# Altium PCB Radios_Comunitarias.PcbDoc (part 2 of 2)
Units mil, origin at the board's own origin, x right, y up, seen from the top; angles counter-clockwise.
Board outline 5905.51 x 3937.01 mil, 2 copper layers (Top Layer, Bottom Layer); 217 components, 199 nets, 908 pads, 113 vias.
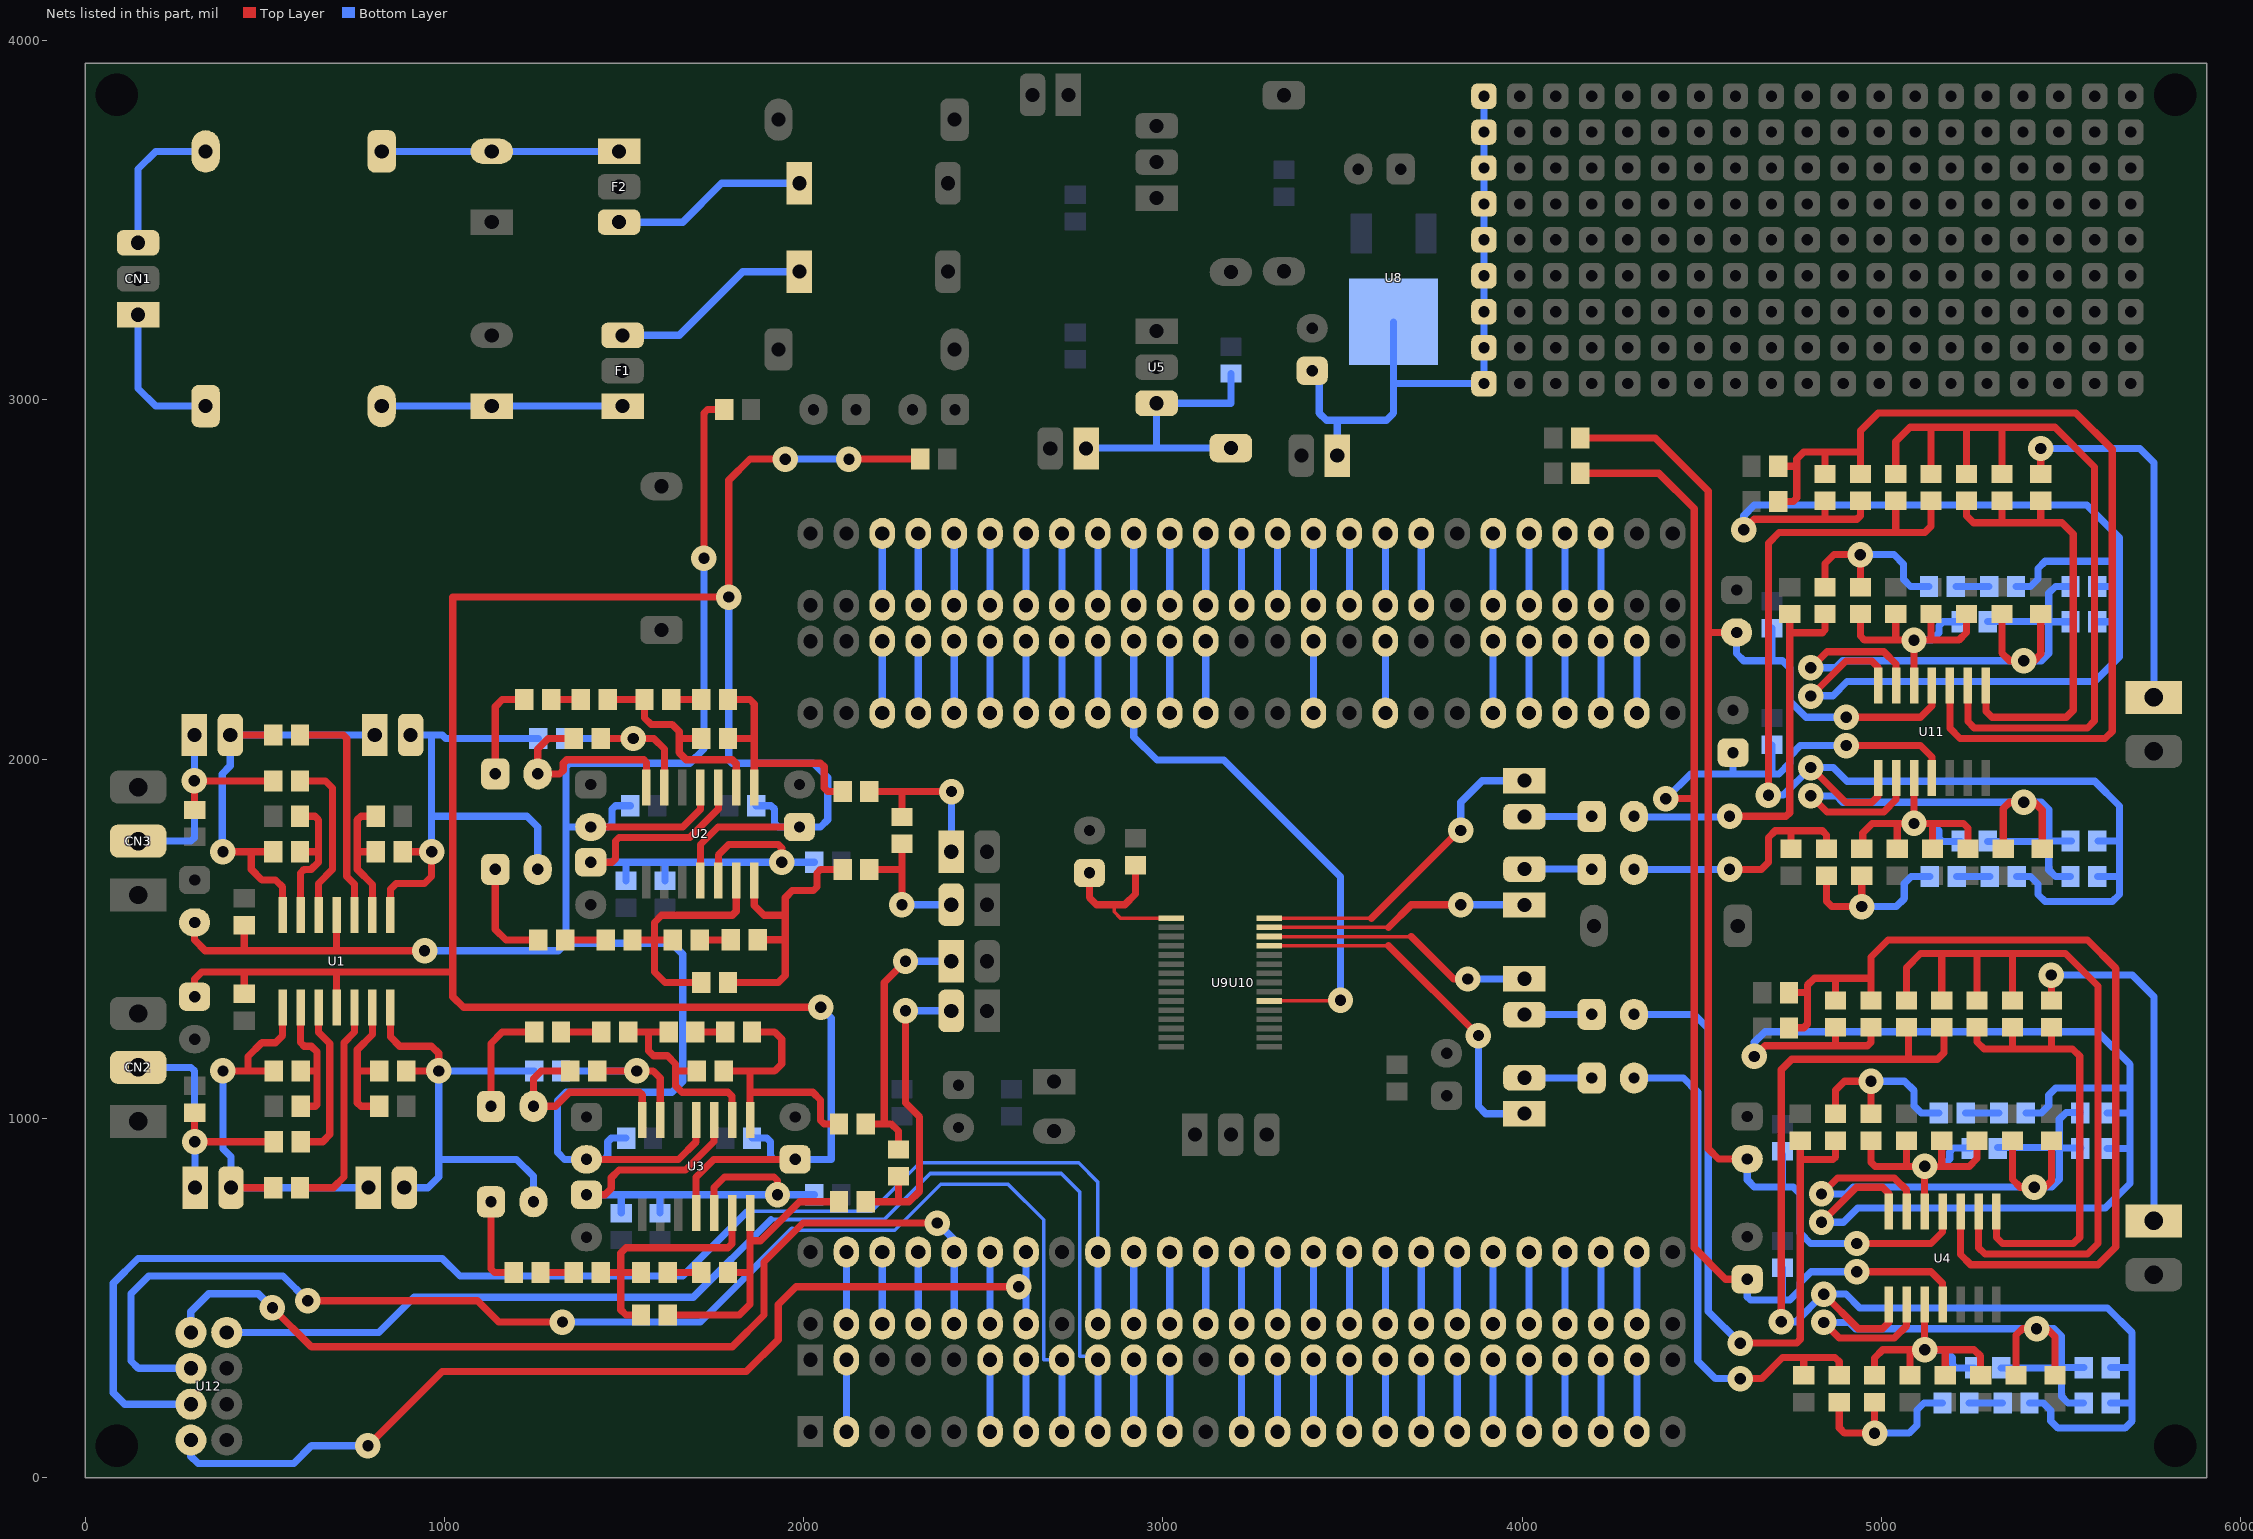
[diagram p2: the nets of this part, all layers, seen from the top]

## Via types
v1: diameter 70.87, hole 31.5, Top Layer to Bottom Layer, 113 vias

## Nets (pads, with @x,y where several pads share a name; then routed paths per layer and width w, separated by ;. In a path a pad name is that pad's centre, name@x,y a point inside that pad or via, vN(x,y) a via of type N, cw(c..) or ccw(c..) an arc to the next point about the centre after c; other vN are vias at no path point) (continued)
I/0UPDATE: U10.P1.10 U12.1 | length 2746.2
  Top Layer w20: v1(521.65,472.44) 629.92,364.17 1801.18,364.17 1889.76,452.76 1889.76,600.39 1998.03,708.66 v1(2372.04,708.66)
  Bottom Layer w20: U12.1@294.49,404.33 294.49,461.81 344.49,511.81 482.28,511.81 v1(521.65,472.44) ; v1(2372.04,708.66) 2418.9,661.81 U10.P1.10@2418.9,627.95 U10.P1.10@2418.9,427.95
NetC3_1: C3.1 D1.1 JP16.1 U5.3 | length 810.1
  Bottom Layer w20: JP16.1@2787.28,2865.24 D1.1@3188.98,2865.24 ; 2982.28,2871.08 U5.3@2982.28,2990.16 3188.98,2990.16 C3.1@3188.98,3072.83
NetC5_1: C5.1 D2.2 F1.1 | length 670.4
  Bottom Layer w20: D2.2@825.71,2982.28 C5.1@1131.89,2982.28 F1.1@1496.06,2982.28
NetC9_1: ?.@3893.31,3044.88 ?.@3893.31,3144.88 ?.@3893.31,3244.88 ?.@3893.31,3344.88 ?.@3893.31,3444.88 ?.@3893.31,3544.88 ?.@3893.31,3644.88 ?.@3893.31,3744.88 ?.@3893.31,3844.88 C9.1 JP15.1 U8.2 | length 1740.7
  Bottom Layer w20: C9.1@3435.04,3080.71 3435.04,2962.6 3454.72,2942.91 3622.05,2942.91 3641.73,2962.6 U8.2@3641.73,3216.54 ; JP15.1@3485.04,2844.49 3485.04,2942.13 ; 3645.28,3044.88 ?.@3893.31,3044.88 ?.@3893.31,3144.88 ?.@3893.31,3244.88 ?.@3893.31,3344.88 ?.@3893.31,3444.88 ?.@3893.31,3544.88 ?.@3893.31,3644.88 ?.@3893.31,3744.88 ?.@3893.31,3844.88
NetC10_2: C10.2 D4.1 F2.1 | length 660.5
  Bottom Layer w20: D4.1@825.71,3690.94 C10.2@1131.89,3690.94 F2.1@1486.22,3690.94
NetC17_1: C17.1 R19.2 R24.1 U3.9 | length 610.8
  Top Layer w20: R24.1@1511.81,1240.16 1567.91,1240.16 ; R19.2@1624.02,1240.16 1567.91,1240.16 ; 1643.7,1131.89 C17.1@1702.76,1131.89 ; U3.9@1800.79,995.14 1800.79,1061.42 1789.37,1072.83 1661.42,1072.83 1643.7,1090.55 1643.7,1151.57 1621.31,1173.97 1581.94,1173.97 1567.91,1187.99 1567.91,1240.16
NetC17_2: C17.2 R20.1 R25.2 U3.8 | length 783.8
  Top Layer w20: C17.2@1777.56,1131.89 1850.79,1131.89 ; U3.8@1850.79,995.14 1850.79,1072.83 ; R20.1@1856.3,1240.16 1919.29,1240.16 1938.98,1220.47 1938.98,1151.57 1919.29,1131.89 1850.79,1131.89 ; R25.2@2098.43,984.25 2057.09,984.25 2047.24,994.09 2047.24,1051.18 2025.59,1072.83 1850.79,1072.83 ; 1850.79,1072.83 1850.79,1131.89
NetC18_1: C18.1 R23.2 | length 308.3
  Top Layer w20: C18.1@1129.92,1033.46 1129.92,1208.66 1161.42,1240.16 R23.2@1250,1240.16
NetC18_2: C18.2 R21.1 U3.14 | length 580.5
  Top Layer w20: R21.1@1350.39,1131.89 1269.69,1131.89 1248.03,1110.24 C18.2@1248.03,1033.46 1309.05,1033.46 1348.43,1072.83 1543.31,1072.83 1550.79,1065.35 U3.14@1550.79,995.14
NetC22_1: C22.1 JP9.2 R31.1 | length 878.1
  Top Layer w20: R31.1@2173.23,767.72 2263.78,767.72 ; C22.1@2263.78,838.58 2263.78,767.72 ; v1(2283.46,1299.21) 2283.46,1043.31 2322.83,1003.94 2322.83,797.24 2293.31,767.72 2263.78,767.72
  Bottom Layer w20: v1(2283.46,1299.21) JP9.2@2410.63,1299.21
NetC22_2: C22.2 JP8.1 R25.1 | length 754.3
  Top Layer w20: R25.1@2173.23,984.25 2224.41,984.25 ; C22.2@2263.78,913.39 2263.78,964.57 2244.09,984.25 2224.41,984.25 ; v1(2283.46,1437.01) 2224.41,1377.95 2224.41,984.25
  Bottom Layer w20: v1(2283.46,1437.01) JP8.1@2410.63,1437.01
NetC24_1: C24.1 R26.2 R29.1 U3.6 | length 740.3
  Top Layer w20: R29.1@1435.04,570.87 1491.14,570.87 ; C24.1@1547.24,452.76 1505.91,452.76 1491.14,467.52 1491.14,570.87 ; R26.2@1547.24,570.87 1491.14,570.87 ; U3.6@1800.78,739.11 1800.78,651.18 1789.37,639.76 1505.91,639.76 1491.14,625 1491.14,570.87
NetC24_2: C24.2 R27.1 R31.2 U3.7 | length 849.3
  Top Layer w20: C24.2@1622.05,452.76 1820.87,452.76 1850.79,482.68 1850.79,659.45 ; R27.1@1789.37,570.87 1850.59,570.87 ; U3.7@1850.79,737.14 1850.79,659.45 ; R31.2@2098.43,767.72 1988.19,767.72 1879.92,659.45 1850.79,659.45
NetC25_1: C25.1 R28.2 | length 254.1
  Top Layer w20: C25.1@1129.92,767.72 1129.92,580.71 1139.76,570.87 R28.2@1192.91,570.87
NetC25_2: C25.2 JP2.2 R9.1 R22.2 U1.7 | length 1407.1
  Top Layer w20: U1.7@850,1308.01 850,1226.77 875.98,1200.79 964.57,1200.79 984.25,1181.1 v1(984.25,1131.89) R9.1@883.86,1131.89
  Bottom Layer w20: JP2.2@888.58,807.09 954.72,807.09 984.25,836.61 984.25,885.83 ; C25.2@1248.03,767.72 1248.03,838.58 1200.79,885.83 984.25,885.83 ; R22.2@1250,1131.89 1049.21,1131.89 v1(984.25,1131.89) 984.25,885.83
NetC26_1: C26.1 C27.1 R30.1 R32.2 U3.5 U3.10 | length 1524
  Top Layer w20: C27.1@1395.67,787.4 1446.85,787.4 1464.57,805.12 1464.57,834.65 1486.22,856.3 1671.26,856.3 1750.79,935.83 U3.10@1750.79,995.14 ; U3.5@1750.79,737.14 1750.79,807.87 1779.53,836.61 1917.32,836.61 1927.17,826.77 v1(1927.17,787.4)
  Bottom Layer w20: C27.1@1395.67,787.4 v1(1927.17,787.4) R30.1@2029.53,787.4 ; C26.1@1492.13,736.22 1492.13,783.46 ; R32.2@1600.39,736.22 1600.39,783.46
NetC28_1: C28.1 R33.2 R38.1 U2.9 | length 612.7
  Top Layer w20: R38.1@1454.72,2165.35 R33.2@1557.09,2165.35 1557.09,2114.17 1574.8,2096.46 1633.86,2096.46 1653.54,2076.77 1653.54,2017.72 1673.23,1998.03 1801.18,1998.03 1812.6,1986.61 U2.9@1812.6,1920.34 ; 1664.68,2057.09 C28.1@1714.57,2057.09
NetC28_2: C28.2 R34.1 R39.2 U2.8 | length 697.2
  Top Layer w20: C28.2@1789.37,2057.09 1862.6,2057.09 ; R34.1@1789.37,2165.35 1850.39,2165.35 1862.6,2153.15 1862.6,2057.09 ; U2.8@1862.6,1920.34 1862.6,2057.09 ; 1862.6,1988.19 2047.24,1988.19 2057.09,1978.35 2057.09,1919.29 2066.93,1909.45 R39.2@2108.27,1909.45
NetC29_1: C29.1 R37.2 | length 275.9
  Top Layer w20: C29.1@1141.73,1958.66 1141.73,2145.67 1161.42,2165.35 R37.2@1222.44,2165.35
NetC29_2: C29.2 R35.1 U2.14 | length 585.4
  Top Layer w20: R35.1@1360.24,2057.09 1289.37,2057.09 1259.84,2027.56 C29.2@1259.84,1958.66 1320.87,1958.66 1330.71,1968.5 1330.71,1988.19 1340.55,1998.03 1397.64,1998.03 1555.12,1998.03 1562.6,1990.55 U2.14@1562.6,1920.34
NetC33_1: C33.1 JP7.2 R45.1 | length 396.9
  Top Layer w20: R45.1@2183.07,1692.91 2273.62,1692.91 ; v1(2273.62,1594.49) 2273.62,1692.91 ; C33.1@2273.62,1763.78 2273.62,1692.91
  Bottom Layer w20: v1(2273.62,1594.49) JP7.2@2410.63,1594.49
NetC33_2: C33.2 JP6.1 R39.1 | length 465.7
  Top Layer w20: R39.1@2183.07,1909.45 2273.62,1909.45 ; C33.2@2273.62,1838.58 2273.62,1909.45 ; v1(2411.42,1909.45) 2273.62,1909.45
  Bottom Layer w20: JP6.1@2411.42,1742.91 v1(2411.42,1909.45)
NetC35_1: C35.1 R40.2 R43.1 U2.6 | length 720.9
  Top Layer w20: R43.1@1523.62,1496.06 1584.65,1496.06 ; R40.2@1635.83,1496.06 1584.65,1496.06 ; C35.1@1714.57,1377.95 1614.17,1377.95 1584.65,1407.48 1584.65,1496.06 ; U2.6@1812.59,1664.31 1812.59,1576.37 1801.18,1564.96 1604.33,1564.96 1584.65,1545.28 1584.65,1496.06
NetC35_2: C35.2 R41.1 R45.2 U2.7 | length 834.5
  Top Layer w20: C35.2@1789.37,1377.95 1929.13,1377.95 1948.82,1397.64 1948.82,1614.17 1968.5,1633.86 2027.56,1633.86 2037.4,1643.7 2037.4,1683.07 2047.24,1692.91 R45.2@2108.27,1692.91 ; U2.7@1862.59,1664.31 1862.59,1592.13 1889.76,1564.96 1938.98,1564.96 ; R41.1@1872.44,1496.98 1947.9,1496.98
NetC36_1: C36.1 R42.2 | length 299.6
  Top Layer w20: C36.1@1141.73,1692.91 1141.73,1525.59 1171.26,1496.06 R42.2@1261.81,1496.06
NetC36_2: C36.2 JP4.2 R16.1 R36.2 U1.8 | length 1470.3
  Top Layer w20: U1.8@850,1566.01 850,1637.4 866.14,1653.54 944.88,1653.54 964.57,1673.23 v1(964.57,1742.13) R16.1@874.02,1742.13
  Bottom Layer w20: JP4.2@906.3,2066.93 964.57,2066.93 ; v1(964.57,1742.13) 964.57,1840.55 ; C36.2@1259.84,1692.91 1259.84,1811.02 1230.32,1840.55 964.57,1840.55 ; R36.2@1261.81,2057.09 1061.02,2057.09 1003.94,2057.09 994.09,2066.93 964.57,2066.93 ; 964.57,1840.55 964.57,2066.93
NetC37_1: C37.1 C38.1 R44.1 R46.2 U2.5 U2.10 | length 1531.6
  Top Layer w20: C38.1@1407.48,1712.6 1466.54,1712.6 1476.38,1722.44 1476.38,1771.65 1486.22,1781.5 1683.07,1781.5 1762.6,1861.02 U2.10@1762.6,1920.34 ; U2.5@1762.6,1662.34 1762.6,1733.07 1791.34,1761.81 1929.13,1761.81 1938.98,1751.97 v1(1938.98,1712.6)
  Bottom Layer w20: C38.1@1407.48,1712.6 1505.91,1712.6 ; C37.1@1505.91,1661.42 1505.91,1712.6 ; R46.2@1614.17,1661.42 1614.17,1712.6 ; R44.1@2029.53,1712.6 v1(1938.98,1712.6) 1614.17,1712.6 ; 1505.91,1712.6 1614.17,1712.6
NetC39_1: C39.1 C40.2 | length 92.5
  Bottom Layer w20: C39.1@5244.09,207.74 C40.2@5336.61,207.74
NetC39_2: C39.2 R47.2 R48.1 | length 509.7
  Top Layer w20: R47.2@4881.89,209.71 4881.89,138.84 4896.85,123.88 v1(4980.31,123.88) R48.1@4980.31,209.71
  Bottom Layer w20: v1(4980.31,123.88) 5076.38,123.88 5098.42,145.93 5098.42,188.06 5118.11,207.74 C39.2@5169.29,207.74
NetC40_1: C40.1 C48.2 R50.2 R51.1 R54.1 U4.1 | length 3368.3
  Top Layer w20: v1(4720.46,434.1) 4720.46,1135.15 4750,1164.69 5074.8,1164.69 ; v1(4838.58,510.76) 4934.91,414.43 5002.36,414.43 5019.68,431.76 U4.1@5019.68,482.28 ; R54.1@5074.8,1253.02 5074.8,1164.69 ; R51.1@5173.23,1253.02 5173.23,1182.15 5155.76,1164.69 5074.8,1164.69
  Bottom Layer w20: v1(4720.46,434.1) 4761.92,434.1 v1(4838.58,510.76) 4901.05,510.76 4939.37,472.44 5628.35,472.44 5697.24,403.54 5697.24,207.74 ; C40.1@5411.42,207.74 5450.13,207.74 5470.87,187.01 5470.87,157.48 5490.55,137.8 5677.56,137.8 5697.24,157.48 5697.24,207.74 ; C48.2@5637.8,207.74 5697.24,207.74 ; R50.2@5637.8,306.17 5696.2,306.17
NetC41_1: C41.1 JP10.2 | length 186.2
  Bottom Layer w20: JP10.2@4006.69,1112.2 C41.1@4192.91,1112.2
NetC41_2: C41.2 R47.1 R49.2 | length 1473.6
  Top Layer w20: v1(4606.3,275.59) 4665.35,275.59 4724.41,334.65 4783.46,334.65 ; R49.2@4783.46,284.51 4783.46,334.65 ; R47.1@4881.89,284.51 4881.89,323.23 4870.47,334.65 4783.46,334.65
  Bottom Layer w20: C41.2@4311.02,1112.2 4448.82,1112.2 4488.19,1072.83 4488.19,324.8 4537.4,275.59 v1(4606.3,275.59)
NetC42_1: C42.1 R51.2 R52.2 R54.2 U4.9 | length 2236.8
  Top Layer w20: R54.2@5068.9,1328.87 5068.9,1419.42 5108.27,1458.79 5167.32,1458.79 ; R51.2@5167.32,1328.87 5167.32,1458.79 ; C42.1@5265.75,1328.87 5265.75,1458.79 ; U4.9@5269.68,740.28 5269.68,639.89 5287.4,622.17 5572.96,622.17 5602.36,651.57 5602.36,1368.24 5511.81,1458.79 5364.17,1458.79 ; R52.2@5364.17,1328.87 5364.17,1458.79 ; 5167.32,1458.79 5265.75,1458.79 ; 5265.75,1458.79 5364.17,1458.79
NetC42_2: C42.2 R52.1 R56.1 U4.8 | length 1286.6
  Top Layer w20: C42.2@5265.75,1254.06 5265.75,1212.72 5285.43,1193.04 5364.17,1193.04 ; U4.8@5319.68,740.28 5319.68,668.63 5336.61,651.7 5533.59,651.7 5551.18,669.29 5551.18,1173.35 5531.5,1193.04 5472.44,1193.04 ; R52.1@5364.17,1254.06 5364.17,1193.04 ; R56.1@5472.44,1254.06 5472.44,1193.04 ; 5364.17,1193.04 5472.44,1193.04
NetC43_1: C43.1 C44.2 C45.2 C46.2 R48.2 U4.3 | length 843.1
  Top Layer w20: R48.2@4980.31,284.51 4980.31,333.33 5003.15,356.17 v1(5119.68,356.17) ; C44.2@5078.74,284.51 5078.74,350.26 ; U4.3@5119.68,482.28 v1(5119.68,356.17) ; C45.2@5177.17,284.51 5177.17,350.26 ; C46.2@5275.59,284.51 5275.59,338.06 5257.48,356.17 v1(5119.68,356.17)
  Bottom Layer w20: v1(5119.68,356.17) 5175.72,356.17 5197.24,334.65 5197.24,314.96 5207.09,305.12 C43.1@5257.87,305.12
NetC43_2: C43.2 C47.1 C48.1 R50.1 R53.1 U4.2 | length 1810.2
  Top Layer w20: v1(4838.58,432.02) 4882.17,388.43 5035.42,388.43 5069.68,422.7 U4.2@5069.68,482.28 ; C47.1@5374.02,284.51 5374.02,396.72 5391.73,414.43 v1(5431.1,414.43) 5459.98,414.43 5482.28,392.13 R53.1@5482.28,284.51
  Bottom Layer w20: v1(4838.58,432.02) 4909.57,432.02 4927.17,414.43 5479.66,414.43 5500.39,393.7 5500.39,305.12 ; C43.2@5332.68,305.12 5500.39,305.12 ; 5501.44,306.17 R50.1@5562.99,306.17 ; C48.1@5561.02,207.74 5519.03,207.74 5500.39,226.38 5500.39,305.12
NetC49_1: C49.1 R55.2 R57.2 R58.2 U4.10 | length 2673.3
  Top Layer w20: C49.1@4742.13,1252.09 4783.46,1252.09 4793.31,1261.94 4793.31,1350.52 ; R58.2@4742.13,1350.52 4793.31,1350.52 ; R57.2@4872.05,1328.87 4872.05,1389.89 ; R55.2@4970.47,1328.87 4970.47,1448.95 5017.59,1496.06 5572.96,1496.06 5651.57,1417.45 5651.57,641.73 5602.49,592.65 5248.03,592.65 5219.68,620.99 U4.10@5219.68,740.28 ; 4970.47,1389.89 4872.05,1389.89 ; 4793.31,1350.52 4793.31,1370.21 4812.99,1389.89 4872.05,1389.89
NetC50_1: C50.1 C51.2 | length 92.5
  Bottom Layer w20: C50.1@5234.25,1014.83 C51.2@5326.77,1014.83
NetC50_2: C50.2 R59.2 R60.1 | length 515.4
  Top Layer w20: R59.2@4872.05,1012.86 4872.05,1078.74 4896.72,1103.41 v1(4970.47,1103.41) R60.1@4970.47,1012.86
  Bottom Layer w20: v1(4970.47,1103.41) 5063.78,1103.41 5090.55,1076.64 5090.55,1034.51 5110.24,1014.83 C50.2@5159.45,1014.83
NetC51_1: C51.1 C62.2 R55.1 R57.1 R62.2 U4.14 | length 3549.1
  Top Layer w20: v1(4645.67,1172.31) 4675.2,1201.83 4872.05,1201.83 ; v1(4832.68,710.76) 4930.05,808.13 5002.36,808.13 5019.68,790.81 U4.14@5019.68,740.28 ; R57.1@4872.05,1253.02 4872.05,1201.83 ; R55.1@4970.47,1253.02 4970.47,1211.68 4960.63,1201.83 4872.05,1201.83
  Bottom Layer w20: v1(4645.67,1172.31) 4645.67,1211.68 4675.2,1241.2 5600.39,1241.2 5691.34,1150.26 5691.34,1014.83 ; v1@4833.72,710.76 4894.09,710.76 4933.46,750.13 5622.44,750.13 5691.34,819.02 5691.34,1014.83 ; C51.1@5401.57,1014.83 5444.23,1014.83 5464.96,1035.56 5464.96,1065.09 5484.65,1084.77 5691.34,1084.77 ; C62.2@5627.95,916.4 5690.29,916.4 ; R62.2@5627.95,1014.83 5691.34,1014.83
NetC53_1: C53.1 JP11.2 | length 186.2
  Bottom Layer w20: JP11.2@4005.91,1288.58 C53.1@4192.13,1288.58
NetC53_2: C53.2 R59.1 R61.2 | length 2006.9
  Top Layer w20: v1(4606.29,374.02) 4607.34,375.06 4763.78,375.06 4773.62,384.91 4773.62,885.83 ; R61.2@4773.62,938.06 4773.62,885.83 ; R59.1@4872.05,938.06 4872.05,893.31 4864.57,885.83 4773.62,885.83
  Bottom Layer w20: C53.2@4311.02,1289.37 4478.35,1289.37 4517.72,1250 4517.72,462.61 v1(4606.29,374.02)
NetC55_1: C55.1 C57.2 C58.2 C59.2 R60.2 U4.12 | length 850.8
  Top Layer w20: R60.2@4970.47,939.1 4970.47,877.82 4981.89,866.4 5068.9,866.4 ; C57.2@5068.9,938.06 5068.9,866.4 ; U4.12@5119.68,740.28 v1(5119.68,866.4) ; C58.2@5167.32,938.06 5167.32,866.4 ; C59.2@5265.75,938.06 5265.75,887.92 5244.23,866.4 5167.32,866.4 ; 5068.9,866.4 v1(5119.68,866.4) ; v1(5119.68,866.4) 5167.32,866.4
  Bottom Layer w20: v1(5119.68,866.4) 5168.9,866.4 5189.37,886.87 5189.37,906.56 5200.26,917.45 C55.1@5248.03,917.45
NetC55_2: C55.2 C60.1 C62.1 R62.1 R63.1 U4.13 | length 1818.5
  Top Layer w20: v1(4832.68,789.5) 4877.31,834.13 5035.42,834.13 5069.68,799.87 U4.13@5069.68,740.28 ; C60.1@5364.17,938.06 5364.17,829.79 5385.83,808.13 v1(5425.2,808.13) 5454.07,808.13 5472.44,826.5 R63.1@5472.44,938.06
  Bottom Layer w20: v1(4832.68,789.5) 4901.57,789.5 4921.26,809.18 5425.2,809.18 5473.76,809.18 5494.49,829.91 5494.49,917.45 ; C55.2@5322.83,918.5 5494.49,918.5 ; R62.1@5553.15,1015.87 5513.13,1015.87 5494.49,997.24 5494.49,918.5 ; C62.1@5555.12,917.45 5494.49,917.45 ; 5494.49,917.45 5494.49,918.5
NetC63_1: C63.1 C64.2 | length 92.5
  Bottom Layer w20: C63.1@5208.66,1673.23 C64.2@5301.18,1673.23
NetC63_2: C63.2 R64.2 R65.1 | length 509.7
  Top Layer w20: R64.2@4846.46,1675.2 4846.46,1604.33 4861.42,1589.37 v1(4944.88,1589.37) R65.1@4944.88,1675.2
  Bottom Layer w20: v1(4944.88,1589.37) 5040.94,1589.37 5062.99,1611.42 5062.99,1653.54 5082.68,1673.23 C63.2@5133.86,1673.23
NetC64_1: C64.1 C72.2 R67.2 R68.1 R71.1 U11.1 | length 3376.6
  Top Layer w20: v1(4685.03,1899.59) 4685.03,2600.64 4714.57,2630.17 5039.37,2630.17 ; v1(4803.15,1976.25) 4900.53,1878.87 4972.83,1878.87 4990.16,1896.2 U11.1@4990.16,1946.72 ; R71.1@5039.37,2718.5 5039.37,2630.17 ; R68.1@5137.8,2718.5 5137.8,2647.64 5120.33,2630.17 5039.37,2630.17
  Bottom Layer w20: v1(4685.03,1899.59) 4726.49,1899.59 v1(4803.15,1976.25) 4865.61,1976.25 4903.94,1937.93 5592.91,1937.93 5661.81,1869.03 5661.81,1673.23 ; C64.1@5375.98,1673.23 5414.7,1673.23 5435.43,1652.5 5435.43,1622.97 5455.12,1603.28 5642.13,1603.28 5661.81,1622.97 5661.81,1673.23 ; C72.2@5600.39,1673.23 5661.81,1673.23 ; R67.2@5602.36,1771.65 5660.76,1771.65
NetC65_1: C65.1 JP12.2 | length 187
  Bottom Layer w20: JP12.2@4005.91,1693.7 C65.1@4192.13,1693.7 ; C65.1@4192.13,1692.91 C65.1@4192.91,1692.91
NetC65_2: C65.2 R64.1 R66.2 | length 713.8
  Top Layer w20: v1(4576.77,1692.91) 4665.35,1692.91 4685.04,1712.6 4685.04,1781.5 4703.68,1800.13 4748.03,1800.13 ; R66.2@4748.03,1750 4748.03,1800.13 ; R64.1@4846.46,1750 4846.46,1788.72 4835.04,1800.13 4748.03,1800.13
  Bottom Layer w20: C65.2@4311.02,1692.91 v1(4576.77,1692.91)
NetC66_1: C66.1 R68.2 R69.2 R71.2 U11.9 | length 2270.4
  Top Layer w20: R71.2@5039.37,2793.31 5039.37,2883.86 5078.74,2923.23 5137.8,2923.23 ; R68.2@5137.8,2793.31 5137.8,2923.23 ; C66.1@5236.22,2793.31 5236.22,2923.23 ; U11.9@5240.16,2204.72 5240.16,2104.33 5257.87,2086.61 5572.83,2086.61 5592.52,2106.3 5592.52,2812.99 5482.28,2923.23 5334.65,2923.23 ; R69.2@5334.65,2793.31 5334.65,2923.23 ; 5137.8,2923.23 5236.22,2923.23 ; 5236.22,2923.23 5334.65,2923.23
NetC66_2: C66.2 R69.1 R73.1 U11.8 | length 1302.1
  Top Layer w20: C66.2@5236.22,2718.5 5236.22,2677.17 5255.91,2657.48 5334.65,2657.48 ; U11.8@5290.16,2204.72 5290.16,2133.07 5307.09,2116.14 5513.78,2116.14 5533.46,2135.83 5533.46,2625.98 5501.97,2657.48 5442.91,2657.48 ; R69.1@5334.65,2718.5 5334.65,2657.48 ; R73.1@5442.91,2718.5 5442.91,2657.48 ; 5334.65,2657.48 5442.91,2657.48
NetC67_1: C67.1 C68.2 C69.2 C70.2 R65.2 U11.3 | length 842.5
  Top Layer w20: R65.2@4947.24,1748.95 4947.24,1794.23 4973.62,1820.61 5043.31,1820.61 ; C69.2@5043.31,1750 5043.31,1820.61 ; U11.3@5090.16,1946.72 v1(5090.16,1820.61) ; C70.2@5141.73,1750 5141.73,1820.61 ; C68.2@5240.16,1750 5240.16,1808.4 5227.95,1820.61 5141.73,1820.61 ; 5043.31,1820.61 v1(5090.16,1820.61) ; v1(5090.16,1820.61) 5141.73,1820.61
  Bottom Layer w20: v1(5090.16,1820.61) 5139.37,1820.61 5159.84,1800.13 5159.84,1780.45 5169.69,1770.61 C67.1@5220.47,1770.61
NetC67_2: C67.2 C71.1 C72.1 R67.1 R70.1 U11.2 | length 1818.5
  Top Layer w20: v1(4803.15,1897.51) 4847.79,1852.87 5005.89,1852.87 5040.16,1887.14 U11.2@5040.16,1946.72 ; C71.1@5338.58,1750 5338.58,1862.2 5356.3,1879.92 v1(5395.67,1879.92) 5424.54,1879.92 5446.85,1857.61 R70.1@5446.85,1750
  Bottom Layer w20: v1(4803.15,1897.51) 4874.14,1897.51 4891.73,1879.92 v1(5395.67,1879.92) 5444.23,1879.92 5464.96,1859.19 5464.96,1770.61 ; C67.2@5295.28,1770.61 5464.96,1770.61 ; 5466.01,1771.65 R67.1@5527.56,1771.65 ; C72.1@5525.59,1673.23 5483.6,1673.23 5464.96,1691.87 5464.96,1770.61
NetC73_1: C73.1 R72.2 R74.2 R75.2 U11.10 | length 2720.1
  Top Layer w20: C73.1@4712.6,2716.54 4753.94,2716.54 4763.78,2726.38 4763.78,2814.96 ; R75.2@4712.6,2814.96 4763.78,2814.96 ; R72.2@4842.52,2793.31 4842.52,2854.33 ; R74.2@4940.94,2793.31 4940.94,2913.39 4990.16,2962.6 5541.34,2962.6 5641.73,2862.2 5641.73,2076.77 5622.05,2057.09 5218.5,2057.09 5190.16,2085.43 U11.10@5190.16,2204.72 ; 4940.94,2854.33 4842.52,2854.33 ; 4763.78,2814.96 4763.78,2834.65 4783.46,2854.33 4842.52,2854.33
NetC74_1: C74.1 C75.2 | length 92.5
  Bottom Layer w20: C74.1@5206.69,2480.32 C75.2@5299.21,2480.32
NetC74_2: C74.2 R76.2 R77.1 | length 517.4
  Top Layer w20: R76.2@4842.52,2478.35 4842.52,2544.23 4867.19,2568.9 v1(4940.94,2568.9) R77.1@4940.94,2478.35
  Bottom Layer w20: v1(4940.94,2568.9) 5034.25,2568.9 5061.02,2542.13 5061.02,2500 5080.71,2480.32 C74.2@5131.89,2480.32
NetC75_1: C75.1 C86.2 R72.1 R74.1 R79.2 U11.14 | length 3541.2
  Top Layer w20: v1(4616.14,2637.8) 4645.67,2667.32 4842.52,2667.32 ; v1(4803.15,2175.2) 4900.53,2272.57 4972.83,2272.57 4990.16,2255.25 U11.14@4990.16,2204.72 ; R72.1@4842.52,2718.5 4842.52,2667.32 ; R74.1@4940.94,2718.5 4940.94,2677.17 4931.1,2667.32 4842.52,2667.32
  Bottom Layer w20: v1(4616.14,2637.8) 4616.14,2677.17 4645.67,2706.69 5570.87,2706.69 5661.81,2615.75 5661.81,2480.32 ; v1@4804.2,2176.24 4864.57,2176.24 4903.94,2215.61 5592.91,2215.61 5661.81,2284.51 5661.81,2480.32 ; C75.1@5374.02,2480.32 5414.7,2480.32 5435.43,2501.05 5435.43,2530.57 5455.12,2550.26 5661.81,2550.26 ; R79.2@5600.39,2480.32 5661.81,2480.32 ; C86.2@5602.36,2381.89 5660.76,2381.89
NetC77_1: C77.1 JP13.2 | length 186.2
  Bottom Layer w20: JP13.2@4005.91,1839.76 C77.1@4192.13,1839.76
NetC77_2: C77.2 R76.1 R78.2 | length 1135.3
  Top Layer w20: v1(4576.77,1840.55) 4734.25,1840.55 4744.09,1850.39 4744.09,2351.32 ; R78.2@4744.09,2403.54 4744.09,2351.32 ; R76.1@4842.52,2403.54 4842.52,2358.8 4835.04,2351.32 4744.09,2351.32
  Bottom Layer w20: C77.2@4313.24,1838.33 4574.55,1838.33 v1(4576.77,1840.55)
NetC79_1: C79.1 C81.2 C82.2 C83.2 R77.2 U11.12 | length 855.9
  Top Layer w20: R77.2@4940.94,2403.54 4940.94,2342.26 4952.36,2330.84 5039.37,2330.84 ; C81.2@5039.37,2403.54 5039.37,2330.84 ; U11.12@5090.16,2204.72 v1(5090.16,2330.84) ; C82.2@5137.8,2403.54 5137.8,2330.84 ; C83.2@5236.22,2403.54 5236.22,2352.36 5214.7,2330.84 5137.8,2330.84 ; 5039.37,2330.84 v1(5090.16,2330.84) ; v1(5090.16,2330.84) 5137.8,2330.84
  Bottom Layer w20: v1(5090.16,2330.84) 5139.37,2330.84 5159.84,2351.32 5159.84,2371 5170.73,2381.89 C79.1@5220.47,2381.89
NetC79_2: C79.2 C84.1 C86.1 R79.1 R80.1 U11.13 | length 1818.5
  Top Layer w20: v1(4803.15,2253.94) 4847.79,2298.57 5005.89,2298.57 5040.16,2264.31 U11.13@5040.16,2204.72 ; C84.1@5334.65,2403.54 5334.65,2295.28 5356.3,2273.62 v1(5395.67,2273.62) 5424.54,2273.62 5442.91,2291.99 R80.1@5442.91,2403.54
  Bottom Layer w20: v1(4803.15,2253.94) 4872.05,2253.94 4891.73,2273.62 v1(5395.67,2273.62) 5444.23,2273.62 5464.96,2294.35 5464.96,2381.89 ; C79.2@5295.28,2382.94 5464.96,2382.94 ; C86.1@5525.59,2381.89 5464.96,2381.89 ; R79.1@5525.59,2480.32 5483.6,2480.32 5464.96,2461.68 5464.96,2382.94 ; 5464.96,2381.89 5464.96,2382.94
NetC87_1: C87.1 C88.1 U9.1 | length 484.4
  Top Layer w10: 2864.17,1594.49 2864.17,1574.8 2881.89,1557.09 U9.1@3023.62,1557.09
  Top Layer w20: C87.1@2795.28,1683.07 2795.28,1614.17 2814.96,1594.49 2864.17,1594.49 2893.7,1594.49 2923.23,1624.02 C88.1@2923.23,1704.72
NetCN2_2: CN2.2 JP1.1 R5.2 R7.2 | length 786.4
  Top Layer w20: R7.2@305.12,1015.75 v1(305.12,935.04) R5.2@525.59,935.04
  Bottom Layer w20: CN2.2@147.64,1141.73 295.28,1141.73 305.12,1131.89 v1(305.12,935.04) ; JP1.1@306.3,807.09 v1@306.3,933.86
NetCN3_2: CN3.2 JP3.1 R12.2 R14.2 | length 745.9
  Top Layer w20: R14.2@305.12,1858.27 305.12,1938.98 R12.2@523.62,1938.98
  Bottom Layer w20: CN3.2@147.64,1771.65 295.28,1771.65 304.33,1780.71 v1(304.33,1939.76) JP3.1@304.33,2066.93
NetF1_3: F1.3 P1.1 | length 565.5
  Bottom Layer w20: F1.3@1496.06,3179.13 1653.54,3179.13 1830.71,3356.3 P1.1@1988.19,3356.3
NetF2_3: F2.3 P2.1 | length 546.8
  Bottom Layer w20: F2.3@1486.22,3494.09 1663.39,3494.09 1771.65,3602.36 P2.1@1988.19,3602.36
NetJP1_2: JP1.2 JP2.1 R6.2 R8.1 U1.1 | length 1212.2
  Top Layer w20: v1(383.86,1131.89) 453.74,1131.89 ; JP1.2@406.3,807.09 R6.2@523.62,807.09 ; R8.1@523.62,1131.89 453.74,1131.89 ; U1.1@550,1308.01 550,1230.32 530.31,1210.63 492.13,1210.63 453.74,1172.24 453.74,1131.89
  Bottom Layer w20: v1(383.86,1131.89) 383.86,915.35 406.3,892.91 JP1.2@406.3,807.09 JP2.1@788.58,807.09 ; v1@403.29,1131.64 v1@403.54,1131.89
NetJP3_2: JP3.2 JP4.1 R13.2 R15.1 U1.14 | length 1234.1
  Top Layer w20: v1(383.86,1742.13) 462.6,1742.13 ; JP3.2@404.33,2066.93 R13.2@523.62,2066.93 ; R15.1@523.62,1742.13 462.6,1742.13 ; U1.14@550,1566.01 550,1643.7 530.31,1663.39 492.13,1663.39 462.6,1692.91 462.6,1742.13
  Bottom Layer w20: v1@381.89,1742.13 381.89,1958.66 404.33,1981.1 JP3.2@404.33,2066.93 JP4.1@806.3,2066.93 ; JP3.2@400.41,2064.96 JP3.2@404.33,2064.96 ; v1@401.32,1742.38 v1@401.57,1742.13
NetJP10_1: JP10.1 U9.27 | length 1019.5
  Top Layer w10: U9.27@3295.28,1480.32 3627.95,1480.32
  Top Layer w20: 3627.95,1480.32 v1(3877.95,1230.32)
  Bottom Layer w20: v1(3877.95,1230.32) 3877.95,1033.46 3898.43,1012.99 JP10.1@4005.91,1012.99
NetJP11_1: JP11.1 U9.28 | length 758.8
  Top Layer w10: U9.28@3295.28,1505.91 3690.94,1505.91
  Top Layer w20: 3690.94,1505.91 3809.06,1387.8 v1(3848.43,1387.8)
  Bottom Layer w20: v1(3848.43,1387.8) JP11.1@4005.12,1387.8
NetJP12_1: JP12.1 U9.29 | length 735.9
  Top Layer w10: U9.29@3295.28,1531.5 3627.95,1531.5
  Top Layer w20: 3627.95,1531.5 3690.94,1594.49 v1(3828.74,1594.49)
  Bottom Layer w20: v1(3828.74,1594.49) JP12.1@4005.12,1594.49
NetJP13_1: JP13.1 U9.30 | length 915.3
  Top Layer w10: U9.30@3295.28,1557.09 3580.71,1557.09
  Top Layer w20: 3580.71,1557.09 3824.8,1801.18 v1(3828.74,1801.18)
  Bottom Layer w20: v1(3828.74,1801.18) 3828.74,1879.92 3888.58,1939.76 JP13.1@4005.91,1939.76
NetP3_1: P3.1 R56.2 | length 1005
  Top Layer w20: R56.2@5472.44,1327.82 v1(5472.44,1398.69)
  Bottom Layer w20: v1(5472.44,1398.69) 5697.77,1398.69 5757.87,1338.58 P3.1@5757.87,714.76
NetP4_1: P4.1 R73.2 | length 1055.5
  Top Layer w20: R73.2@5442.91,2793.31 v1(5442.91,2864.17)
  Bottom Layer w20: v1(5442.91,2864.17) 5718.5,2864.17 5757.87,2824.8 P4.1@5757.87,2171.46
NetR5_1: R5.1 U1.3 | length 455
  Top Layer w20: R5.1@600.39,935.04 661.42,935.04 681.1,954.72 681.1,1208.66 650,1239.76 U1.3@650,1308.01
NetR6_1: R6.1 U1.5 | length 617.9
  Top Layer w20: R6.1@598.42,807.09 690.94,807.09 720.47,836.61 720.47,1210.63 750,1240.16 U1.5@750,1308.01
NetR8_2: R8.2 R10.1 U1.2 | length 392.5
  Top Layer w20: U1.2@600,1308.01 600,1211.02 610.24,1200.79 629.92,1200.79 645.26,1185.45 645.26,1131.89 ; R10.1@600.39,1033.46 641.73,1033.46 645.26,1036.99 645.26,1131.89 ; R8.2@600.39,1131.89 645.26,1131.89
NetR9_2: R9.2 R11.1 U1.6 | length 408.3
  Top Layer w20: U1.6@800,1308.01 800,1233.07 757.87,1190.94 757.87,1131.89 ; R11.1@818.9,1033.46 767.72,1033.46 757.87,1043.31 757.87,1131.89 ; R9.2@818.9,1131.89 757.87,1131.89
NetR12_1: R12.1 U1.12 | length 468.1
  Top Layer w20: R12.1@598.42,1938.98 669.29,1938.98 688.98,1919.29 688.98,1692.91 650,1653.94 U1.12@650,1566.01
NetR13_1: R13.1 U1.10 | length 634
  Top Layer w20: R13.1@598.42,2066.93 718.5,2066.93 728.35,2057.09 728.35,1673.23 750,1651.57 U1.10@750,1566.01
NetR15_2: R15.2 R17.1 U1.13 | length 403.2
  Top Layer w20: R15.2@598.42,1742.13 649.61,1742.13 ; R17.1@598.42,1840.55 639.76,1840.55 649.61,1830.71 649.61,1742.13 ; U1.13@600,1566.01 600,1682.68 610.24,1692.91 629.92,1692.91 649.61,1712.6 649.61,1742.13
NetR16_2: R16.2 R18.1 U1.9 | length 388.6
  Top Layer w20: U1.9@800,1566.01 800,1650.79 757.87,1692.91 757.87,1742.13 ; R16.2@809.06,1742.13 757.87,1742.13 ; R18.1@809.06,1840.55 767.72,1840.55 757.87,1830.71 757.87,1742.13
NetR19_1: R19.1 R20.2 | length 82.7
  Top Layer w20: R19.1@1698.82,1240.16 R20.2@1781.5,1240.16
NetR21_2: R21.2 R22.1 U3.13 | length 511.4
  Top Layer w20: R21.2@1425.2,1131.89 v1(1535.43,1131.89) 1581.1,1131.89 1600.79,1112.2 U3.13@1600.79,995.14
  Bottom Layer w20: R22.1@1324.8,1131.89 v1(1535.43,1131.89)
NetR23_1: R23.1 R24.2 | length 112.2
  Top Layer w20: R23.1@1324.8,1240.16 R24.2@1437.01,1240.16
NetR26_1: R26.1 R27.2 | length 92.5
  Top Layer w20: R26.1@1622.05,570.87 R27.2@1714.57,570.87
NetR28_1: R28.1 R29.2 | length 92.5
  Top Layer w20: R28.1@1267.72,570.87 R29.2@1360.24,570.87
NetR33_1: R33.1 R34.2 | length 82.7
  Top Layer w20: R33.1@1631.89,2165.35 R34.2@1714.57,2165.35
NetR35_2: R35.2 R36.1 U2.13 | length 486
  Top Layer w20: R35.2@1435.04,2057.09 v1(1525.59,2057.09) 1583.07,2057.09 1612.6,2027.56 U2.13@1612.6,1920.34
  Bottom Layer w20: R36.1@1336.61,2057.09 v1(1525.59,2057.09)
NetR37_1: R37.1 R38.2 | length 82.7
  Top Layer w20: R37.1@1297.24,2165.35 R38.2@1379.92,2165.35
NetR40_1: R40.1 R41.2 | length 86.1
  Top Layer w20: R40.1@1710.63,1496.06 R41.2@1796.71,1496.06
NetR42_1: R42.1 R43.2 | length 112.2
  Top Layer w20: R42.1@1336.61,1496.06 R43.2@1448.82,1496.06
P1.3: U10.P1.3 | length 200
  Bottom Layer w20: U10.P1.3@2118.9,127.95 U10.P1.3@2118.9,327.95
P1.4: U10.P1.4 | length 200
  Bottom Layer w20: U10.P1.4@2118.9,427.95 U10.P1.4@2118.9,627.95
P1.6: U10.P1.6 | length 200
  Bottom Layer w20: U10.P1.6@2218.9,427.95 U10.P1.6@2218.9,627.95
P1.8: U10.P1.8 | length 200
  Bottom Layer w20: U10.P1.8@2318.9,427.95 U10.P1.8@2318.9,627.95
P1.11: U10.P1.11 | length 200
  Bottom Layer w20: U10.P1.11@2518.9,127.95 U10.P1.11@2518.9,327.95
P1.12: U10.P1.12 | length 200
  Bottom Layer w20: U10.P1.12@2518.9,427.95 U10.P1.12@2518.9,627.95
P1.13: U10.P1.13 | length 200
  Bottom Layer w20: U10.P1.13@2618.9,127.95 U10.P1.13@2618.9,327.95
P1.19: U10.P1.19 | length 200
  Bottom Layer w20: U10.P1.19@2918.9,127.95 U10.P1.19@2918.9,327.95
P1.20: U10.P1.20 | length 200
  Bottom Layer w20: U10.P1.20@2918.9,427.95 U10.P1.20@2918.9,627.95
P1.21: U10.P1.21 | length 200
  Bottom Layer w20: U10.P1.21@3018.9,127.95 U10.P1.21@3018.9,327.95
P1.22: U10.P1.22 | length 200
  Bottom Layer w20: U10.P1.22@3018.9,427.95 U10.P1.22@3018.9,627.95
P1.24: U10.P1.24 | length 200
  Bottom Layer w20: U10.P1.24@3118.9,427.95 U10.P1.24@3118.9,627.95
P1.25: U10.P1.25 | length 200
  Bottom Layer w20: U10.P1.25@3218.9,127.95 U10.P1.25@3218.9,327.95
P1.26: U10.P1.26 | length 200
  Bottom Layer w20: U10.P1.26@3218.9,427.95 U10.P1.26@3218.9,627.95
P1.27: U10.P1.27 | length 200
  Bottom Layer w20: U10.P1.27@3318.9,127.95 U10.P1.27@3318.9,327.95
P1.28: U10.P1.28 | length 200
  Bottom Layer w20: U10.P1.28@3318.9,427.95 U10.P1.28@3318.9,627.95
P1.29: U10.P1.29 | length 200
  Bottom Layer w20: U10.P1.29@3418.9,127.95 U10.P1.29@3418.9,327.95
P1.30: U10.P1.30 | length 200
  Bottom Layer w20: U10.P1.30@3418.9,427.95 U10.P1.30@3418.9,627.95
P1.31: U10.P1.31 | length 200
  Bottom Layer w20: U10.P1.31@3518.9,127.95 U10.P1.31@3518.9,327.95
P1.32: U10.P1.32 | length 200
  Bottom Layer w20: U10.P1.32@3518.9,427.95 U10.P1.32@3518.9,627.95
P1.33: U10.P1.33 | length 200
  Bottom Layer w20: U10.P1.33@3618.9,127.95 U10.P1.33@3618.9,327.95
P1.34: U10.P1.34 | length 200
  Bottom Layer w20: U10.P1.34@3618.9,427.95 U10.P1.34@3618.9,627.95
P1.35: U10.P1.35 | length 200
  Bottom Layer w20: U10.P1.35@3718.9,127.95 U10.P1.35@3718.9,327.95
P1.36: U10.P1.36 | length 200
  Bottom Layer w20: U10.P1.36@3718.9,427.95 U10.P1.36@3718.9,627.95
P1.37: U10.P1.37 | length 200
  Bottom Layer w20: U10.P1.37@3818.9,127.95 U10.P1.37@3818.9,327.95
P1.38: U10.P1.38 | length 200
  Bottom Layer w20: U10.P1.38@3818.9,427.95 U10.P1.38@3818.9,627.95
P1.39: U10.P1.39 | length 200
  Bottom Layer w20: U10.P1.39@3918.9,127.95 U10.P1.39@3918.9,327.95
P1.40: U10.P1.40 | length 200
  Bottom Layer w20: U10.P1.40@3918.9,427.95 U10.P1.40@3918.9,627.95
P1.41: U10.P1.41 | length 200
  Bottom Layer w20: U10.P1.41@4018.9,127.95 U10.P1.41@4018.9,327.95
P1.42: U10.P1.42 | length 200
  Bottom Layer w20: U10.P1.42@4018.9,427.95 U10.P1.42@4018.9,627.95
P1.43: U10.P1.43 | length 200
  Bottom Layer w20: U10.P1.43@4118.9,127.95 U10.P1.43@4118.9,327.95
P1.44: U10.P1.44 | length 200
  Bottom Layer w20: U10.P1.44@4118.9,427.95 U10.P1.44@4118.9,627.95
P1.45: U10.P1.45 | length 200
  Bottom Layer w20: U10.P1.45@4218.9,127.95 U10.P1.45@4218.9,327.95
P1.46: U10.P1.46 | length 200
  Bottom Layer w20: U10.P1.46@4218.9,427.95 U10.P1.46@4218.9,627.95
P1.47: U10.P1.47 | length 200
  Bottom Layer w20: U10.P1.47@4318.9,127.95 U10.P1.47@4318.9,327.95
P1.48: U10.P1.48 | length 200
  Bottom Layer w20: U10.P1.48@4318.9,427.95 U10.P1.48@4318.9,627.95
P2.5: U10.P2.5 | length 200
  Bottom Layer w20: U10.P2.5@2218.9,2127.95 U10.P2.5@2218.9,2327.95
P2.6: U10.P2.6 | length 200
  Bottom Layer w20: U10.P2.6@2218.9,2427.95 U10.P2.6@2218.9,2627.95
P2.7: U10.P2.7 | length 200
  Bottom Layer w20: U10.P2.7@2318.9,2127.95 U10.P2.7@2318.9,2327.95
P2.8: U10.P2.8 | length 200
  Bottom Layer w20: U10.P2.8@2318.9,2427.95 U10.P2.8@2318.9,2627.95
P2.9: U10.P2.9 | length 200
  Bottom Layer w20: U10.P2.9@2418.9,2127.95 U10.P2.9@2418.9,2327.95
P2.10: U10.P2.10 | length 200
  Bottom Layer w20: U10.P2.10@2418.9,2427.95 U10.P2.10@2418.9,2627.95
P2.11: U10.P2.11 | length 200
  Bottom Layer w20: U10.P2.11@2518.9,2127.95 U10.P2.11@2518.9,2327.95
P2.12: U10.P2.12 | length 200
  Bottom Layer w20: U10.P2.12@2518.9,2427.95 U10.P2.12@2518.9,2627.95
P2.13: U10.P2.13 | length 200
  Bottom Layer w20: U10.P2.13@2618.9,2127.95 U10.P2.13@2618.9,2327.95
P2.14: U10.P2.14 | length 200
  Bottom Layer w20: U10.P2.14@2618.9,2427.95 U10.P2.14@2618.9,2627.95
P2.15: U10.P2.15 | length 200
  Bottom Layer w20: U10.P2.15@2718.9,2127.95 U10.P2.15@2718.9,2327.95
P2.16: U10.P2.16 | length 200
  Bottom Layer w20: U10.P2.16@2718.9,2427.95 U10.P2.16@2718.9,2627.95
P2.17: U10.P2.17 | length 200
  Bottom Layer w20: U10.P2.17@2818.9,2127.95 U10.P2.17@2818.9,2327.95
P2.18: U10.P2.18 | length 200
  Bottom Layer w20: U10.P2.18@2818.9,2427.95 U10.P2.18@2818.9,2627.95
P2.20: U10.P2.20 | length 200
  Bottom Layer w20: U10.P2.20@2918.9,2427.95 U10.P2.20@2918.9,2627.95
P2.21: U10.P2.21 | length 200
  Bottom Layer w20: U10.P2.21@3018.9,2127.95 U10.P2.21@3018.9,2327.95
P2.22: U10.P2.22 | length 200
  Bottom Layer w20: U10.P2.22@3018.9,2427.95 U10.P2.22@3018.9,2627.95
P2.23: U10.P2.23 | length 200
  Bottom Layer w20: U10.P2.23@3118.9,2127.95 U10.P2.23@3118.9,2327.95
P2.24: U10.P2.24 | length 200
  Bottom Layer w20: U10.P2.24@3118.9,2427.95 U10.P2.24@3118.9,2627.95
P2.26: U10.P2.26 | length 200
  Bottom Layer w20: U10.P2.26@3218.9,2427.95 U10.P2.26@3218.9,2627.95
P2.28: U10.P2.28 | length 200
  Bottom Layer w20: U10.P2.28@3318.9,2427.95 U10.P2.28@3318.9,2627.95
P2.29: U10.P2.29 | length 200
  Bottom Layer w20: U10.P2.29@3418.9,2127.95 U10.P2.29@3418.9,2327.95
P2.30: U10.P2.30 | length 200
  Bottom Layer w20: U10.P2.30@3418.9,2427.95 U10.P2.30@3418.9,2627.95
P2.32: U10.P2.32 | length 200
  Bottom Layer w20: U10.P2.32@3518.9,2427.95 U10.P2.32@3518.9,2627.95
P2.33: U10.P2.33 | length 200
  Bottom Layer w20: U10.P2.33@3618.9,2127.95 U10.P2.33@3618.9,2327.95
P2.34: U10.P2.34 | length 200
  Bottom Layer w20: U10.P2.34@3618.9,2427.95 U10.P2.34@3618.9,2627.95
P2.36: U10.P2.36 | length 200
  Bottom Layer w20: U10.P2.36@3718.9,2427.95 U10.P2.36@3718.9,2627.95
P2.39: U10.P2.39 | length 200
  Bottom Layer w20: U10.P2.39@3918.9,2127.95 U10.P2.39@3918.9,2327.95
P2.40: U10.P2.40 | length 200
  Bottom Layer w20: U10.P2.40@3918.9,2427.95 U10.P2.40@3918.9,2627.95
P2.41: U10.P2.41 | length 200
  Bottom Layer w20: U10.P2.41@4018.9,2127.95 U10.P2.41@4018.9,2327.95
P2.42: U10.P2.42 | length 200
  Bottom Layer w20: U10.P2.42@4018.9,2427.95 U10.P2.42@4018.9,2627.95
P2.43: U10.P2.43 | length 200
  Bottom Layer w20: U10.P2.43@4118.9,2127.95 U10.P2.43@4118.9,2327.95
P2.44: U10.P2.44 | length 200
  Bottom Layer w20: U10.P2.44@4118.9,2427.95 U10.P2.44@4118.9,2627.95
P2.45: U10.P2.45 | length 200
  Bottom Layer w20: U10.P2.45@4218.9,2127.95 U10.P2.45@4218.9,2327.95
P2.46: U10.P2.46 | length 200
  Bottom Layer w20: U10.P2.46@4218.9,2427.95 U10.P2.46@4218.9,2627.95
P2.47: U10.P2.47 | length 200
  Bottom Layer w20: U10.P2.47@4318.9,2127.95 U10.P2.47@4318.9,2327.95
PDN: U9.21 U10.P2.19 | length 1545.2
  Top Layer w10: U9.21@3295.28,1326.77 v1@3494.09,1326.77
  Bottom Layer w20: U10.P2.19@2918.9,2327.95 U10.P2.19@2918.9,2127.95 2918.9,2061.42 2983.37,1996.95 3169.29,1996.95 3494.09,1672.14 v1(3494.09,1328.74)
RESET: U10.P1.14 U12.7 | length 2838.9
  Top Layer w20: v1(787.4,88.58) 994.09,295.28 1840.55,295.28 1929.13,383.86 1929.13,482.28 1978.35,531.5 v1(2598.43,531.5)
  Bottom Layer w20: U12.7@294.49,104.33 294.49,59.84 314.96,39.37 580.71,39.37 629.92,88.58 v1(787.4,88.58) ; v1(2598.43,531.5) v1@2618.9,531.5 ; U10.P1.14@2618.9,427.95 v1@2618.9,531.5 ; U10.P1.14@2618.9,627.95 v1@2618.9,531.5
SPI1_MISO: U10.P1.18 U12.5 | length 3870.5
  Bottom Layer w10: 1843.33,740.97 2187.82,740.97 2322.83,875.98 2765.75,875.98 2818.9,822.83 U10.P1.18@2818.9,627.95
  Bottom Layer w20: U12.5@294.49,204.33 110.63,204.33 78.74,236.22 78.74,541.34 147.64,610.24 994.09,610.24 1043.31,561.02 1663.39,561.02 1843.33,740.97 ; U10.P1.18@2818.9,427.95 U10.P1.18@2818.9,627.95
SPI1_MOSI: U10.P1.17 U12.2 | length 3289.6
  Bottom Layer w10: 1909.45,718.5 2224.41,718.5 2352.36,846.46 2716.54,846.46 2768.9,794.09 2768.9,337.8 2809.06,337.8 U10.P1.17@2818.9,327.95
  Bottom Layer w20: U12.2@394.49,404.33 817.72,404.33 915.35,501.97 1692.91,501.97 1909.45,718.5 ; U10.P1.17@2818.9,127.95 U10.P1.17@2818.9,327.95
SPI1_SCK: U10.P1.15 U12.3 | length 3816
  Top Layer w20: v1(620.08,492.13) 1092.52,492.13 1151.57,433.07 v1(1328.74,433.07)
  Bottom Layer w10: 1968.5,688.98 2253.94,688.98 2381.89,816.93 2568.9,816.93 2668.48,717.35 2668.48,327.95 U10.P1.15@2718.9,327.95
  Bottom Layer w20: U12.3@294.49,304.33 148.43,304.33 127.95,324.8 127.95,511.81 177.17,561.02 551.18,561.02 v1(620.08,492.13) ; v1(1328.74,433.07) 1712.6,433.07 1968.5,688.98 ; U10.P1.15@2718.9,127.95 U10.P1.15@2718.9,327.95
V+: CN1.1 D2.1 | length 413.6
  Bottom Layer w20: CN1.1@147.64,3236.61 147.64,3031.5 196.85,2982.28 D2.1@335.71,2982.28
V-: CN1.3 D4.2 | length 413.6
  Bottom Layer w20: CN1.3@147.64,3436.61 147.64,3641.73 196.85,3690.94 D4.2@335.71,3690.94
VOP_ADC+: C19.1 C20.1 C30.1 C31.1 C91.1 C92.1 R2.1 U1.4 U2.4 U3.4 | length 7350.6
  Top Layer w20: C91.1@305.12,1338.58 305.12,1387.8 324.8,1407.48 1023.62,1407.48 ; C92.1@442.91,1346.46 442.91,1407.48 ; U1.4@700,1308.01 700,1407.48 ; U3.4@1700.79,737.14 1700.79,836.61 1750,885.83 C19.1@1976.38,885.83 ; U2.4@1712.6,1662.34 1712.6,1761.81 1761.81,1811.02 C30.1@1988.19,1811.02 ; v1(1948.82,2834.65) 1850.39,2834.65 1791.34,2775.59 v1(1791.34,2450.79) 1023.62,2450.79 1023.62,1338.58 1053.15,1309.06 v1(2047.24,1309.06) ; v1(2125.98,2834.65) R2.1@2324.8,2834.65
  Bottom Layer w20: v1(1791.34,2450.79) 1791.34,1998.03 1801.18,1988.19 2027.56,1988.19 2066.93,1948.82 2066.93,1830.71 2047.24,1811.02 C30.1@1988.19,1811.02 1929.13,1811.02 1919.29,1820.87 1919.29,1860.24 1909.45,1870.08 C31.1@1868.11,1870.08 ; C20.1@1856.3,944.88 1897.64,944.88 1907.48,935.04 1907.48,895.67 1917.32,885.83 C19.1@1976.38,885.83 2076.77,885.83 2076.77,1279.53 v1(2047.24,1309.06) ; v1(1948.82,2834.65) v1(2125.98,2834.65)
VOP_ADC-: C21.1 C23.2 C32.1 C34.2 C93.1 C94.2 R1.1 U1.11 U2.11 U3.11 | length 5615
  Top Layer w20: C94.2@305.12,1545.28 305.12,1496.06 334.65,1466.54 442.91,1466.54 ; C93.1@442.91,1537.4 442.91,1466.54 ; 700,1466.54 U1.11@700,1566.01 ; v1(944.88,1466.54) 442.91,1466.54 ; C23.2@1395.67,885.83 1651.57,885.83 1700.79,935.04 U3.11@1700.79,995.14 ; C34.2@1407.48,1811.02 1663.39,1811.02 1712.6,1860.24 U2.11@1712.6,1920.34 ; v1(1722.44,2559.06) 1722.44,2962.6 1732.28,2972.44 R1.1@1778.74,2972.44
  Bottom Layer w20: v1(944.88,1466.54) 1317.72,1466.54 1338.58,1487.4 ; C21.1@1505.91,944.88 1464.57,944.88 1454.72,935.04 1454.72,895.67 1444.88,885.83 C23.2@1395.67,885.83 1334.65,885.83 1314.96,905.51 1314.96,1049.21 1338.58,1072.83 1633.86,1072.83 1663.39,1102.36 1663.39,1456.69 1632.68,1487.4 1338.58,1487.4 ; C32.1@1517.72,1870.08 1476.38,1870.08 1466.54,1860.24 1466.54,1820.87 1456.69,1811.02 C34.2@1407.48,1811.02 1338.58,1811.02 ; v1(1722.44,2559.06) 1722.44,2027.56 1683.07,1988.19 1348.43,1988.19 1338.58,1978.35 1338.58,1811.02 ; 1338.58,1487.4 1338.58,1811.02
VOP_DAC+: C52.1 C54.1 C76.1 C78.1 R4.1 U4.4 U11.4 | length 4504.6
  Top Layer w20: R4.1@4161.42,2795.28 4379.92,2795.28 4478.35,2696.85 4478.35,1889.76 ; v1(4399.61,1889.76) 4478.35,1889.76 ; C52.1@4625.98,552.23 4565.88,552.23 4478.35,639.76 4478.35,1889.76 ; v1(4901.57,2037.4) 5108.27,2037.4 5140.16,2005.51 U11.4@5140.16,1946.72 ; v1(4931.1,572.96) 5137.79,572.96 5169.68,541.07 U4.4@5169.68,482.28
  Bottom Layer w20: v1(4399.61,1889.76) 4468.5,1958.66 4586.61,1958.66 ; C76.1@4586.61,2017.72 4586.61,1958.66 ; C52.1@4625.98,552.23 4625.98,503.02 4634.78,494.22 4744.09,494.22 4773.62,523.75 4773.62,543.43 4803.15,572.96 v1(4931.1,572.96) ; C78.1@4694.88,2039.37 4694.88,1958.66 ; 4724.41,494.22 C54.1@4724.41,583.72 ; v1(4901.57,2037.4) 4773.62,2037.4 4744.09,2007.87 4744.09,1988.19 4714.57,1958.66 4694.88,1958.66 ; 4586.61,1958.66 4694.88,1958.66
VOP_DAC-: C56.1 C61.2 C80.1 C85.2 R3.1 U4.11 U11.11 | length 4237.3
  Top Layer w20: R3.1@4161.42,2893.7 4370.08,2893.7 4517.72,2746.06 4517.72,915.35 4546.2,886.87 C61.2@4625.98,886.87 ; 4517.72,2352.36 C85.2@4596.46,2352.36 ; v1(4901.57,2116.14) 5108.27,2116.14 5140.16,2148.03 U11.11@5140.16,2204.72 ; v1(4931.1,651.7) 5137.79,651.7 5169.68,683.59 U4.11@5169.68,740.28
  Bottom Layer w20: C85.2@4596.46,2352.36 4596.46,2293.31 4616.14,2273.62 4694.88,2273.62 ; C61.2@4625.98,886.87 4625.98,828.87 4645.67,809.18 4724.41,809.18 ; C80.1@4694.88,2364.17 4694.88,2273.62 ; C56.1@4724.41,899.73 4724.41,809.18 ; v1(4901.57,2116.14) 4789.47,2116.14 4744.09,2161.51 4744.09,2253.94 4724.41,2273.62 4694.88,2273.62 ; v1(4931.1,651.7) 4802.1,651.7 4773.62,680.18 4773.62,789.5 4753.94,809.18 4724.41,809.18
pads on no net: ?.@3993.31,3144.88 ?.@3993.31,3244.88 ?.@3993.31,3344.88 ?.@3993.31,3444.88 ?.@3993.31,3544.88 ?.@3993.31,3644.88 ?.@3993.31,3744.88 ?.@3993.31,3844.88 ?.@4093.31,3144.88 ?.@4093.31,3244.88 ?.@4093.31,3344.88 ?.@4093.31,3444.88 ?.@4093.31,3544.88 ?.@4093.31,3644.88 ?.@4093.31,3744.88 ?.@4093.31,3844.88 ?.@4193.31,3144.88 ?.@4193.31,3244.88 ?.@4193.31,3344.88 ?.@4193.31,3444.88 ?.@4193.31,3544.88 ?.@4193.31,3644.88 ?.@4193.31,3744.88 ?.@4193.31,3844.88 ?.@4293.31,3144.88 ?.@4293.31,3244.88 ?.@4293.31,3344.88 ?.@4293.31,3444.88 ?.@4293.31,3544.88 ?.@4293.31,3644.88 ?.@4293.31,3744.88 ?.@4293.31,3844.88 ?.@4393.31,3144.88 ?.@4393.31,3244.88 ?.@4393.31,3344.88 ?.@4393.31,3444.88 ?.@4393.31,3544.88 ?.@4393.31,3644.88 ?.@4393.31,3744.88 ?.@4393.31,3844.88 ?.@4493.31,3144.88 ?.@4493.31,3244.88 ?.@4493.31,3344.88 ?.@4493.31,3444.88 ?.@4493.31,3544.88 ?.@4493.31,3644.88 ?.@4493.31,3744.88 ?.@4493.31,3844.88 ?.@4593.31,3144.88 ?.@4593.31,3244.88 ?.@4593.31,3344.88 ?.@4593.31,3444.88 ?.@4593.31,3544.88 ?.@4593.31,3644.88 ?.@4593.31,3744.88 ?.@4593.31,3844.88 ?.@4693.31,3144.88 ?.@4693.31,3244.88 ?.@4693.31,3344.88 ?.@4693.31,3444.88 ?.@4693.31,3544.88 ?.@4693.31,3644.88 ?.@4693.31,3744.88 ?.@4693.31,3844.88 ?.@4793.31,3144.88 ?.@4793.31,3244.88 ?.@4793.31,3344.88 ?.@4793.31,3444.88 ?.@4793.31,3544.88 ?.@4793.31,3644.88 ?.@4793.31,3744.88 ?.@4793.31,3844.88 ?.@4893.31,3144.88 ?.@4893.31,3244.88 ?.@4893.31,3344.88 ?.@4893.31,3444.88 ?.@4893.31,3544.88 ?.@4893.31,3644.88 ?.@4893.31,3744.88 ?.@4893.31,3844.88 ?.@4993.31,3144.88 ?.@4993.31,3244.88 ?.@4993.31,3344.88 ?.@4993.31,3444.88 ?.@4993.31,3544.88 ?.@4993.31,3644.88 ?.@4993.31,3744.88 ?.@4993.31,3844.88 ?.@5093.31,3144.88 ?.@5093.31,3244.88 ?.@5093.31,3344.88 ?.@5093.31,3444.88 ?.@5093.31,3544.88 ?.@5093.31,3644.88 ?.@5093.31,3744.88 ?.@5093.31,3844.88 ?.@5193.31,3144.88 ?.@5193.31,3244.88 ?.@5193.31,3344.88 ?.@5193.31,3444.88 ?.@5193.31,3544.88 ?.@5193.31,3644.88 ?.@5193.31,3744.88 ?.@5193.31,3844.88 ?.@5293.31,3144.88 ?.@5293.31,3244.88 ?.@5293.31,3344.88 ?.@5293.31,3444.88 ?.@5293.31,3544.88 ?.@5293.31,3644.88 ?.@5293.31,3744.88 ?.@5293.31,3844.88 ?.@5393.31,3144.88 ?.@5393.31,3244.88 ?.@5393.31,3344.88 ?.@5393.31,3444.88 ?.@5393.31,3544.88 ?.@5393.31,3644.88 ?.@5393.31,3744.88 ?.@5393.31,3844.88 ?.@5493.31,3144.88 ?.@5493.31,3244.88 ?.@5493.31,3344.88 ?.@5493.31,3444.88 ?.@5493.31,3544.88 ?.@5493.31,3644.88 ?.@5493.31,3744.88 ?.@5493.31,3844.88 ?.@5593.31,3144.88 ?.@5593.31,3244.88 ?.@5593.31,3344.88 ?.@5593.31,3444.88 ?.@5593.31,3544.88 ?.@5593.31,3644.88 ?.@5593.31,3744.88 ?.@5593.31,3844.88 U2.1 U3.1 U4.7 U9.15 U9.16 U11.7

## Polygon pours and split planes (outlines as drawn)
GROUND on Bottom Layer "GROUND_PLANE_BOTTOM" (solid, remove dead copper, pour order 10): 19.68,3917.32 3779.53,3917.32 3779.53,3592.52 3779.53,3395.67 3474.41,3395.67 3474.41,2992.13 3848.43,2992.13 3946.85,2992.13 3946.85,3090.55 5649.61,3090.55 5649.61,3917.32 5885.83,3917.32 5885.83,19.68 4478.35,19.68 4478.35,2696.85 1958.66,2696.85 1958.66,19.68 19.68,19.68 19.68,3917.32
NetC9_1 on Bottom Layer "3V3_PLANE_BOTTOM" (solid, remove dead copper, pour order 8): 3484.25,3385.83 3484.25,3001.97 3828.74,3001.97 3937.01,3001.97 3937.01,3897.64 3789.37,3897.64 3789.37,3385.83 3484.25,3385.83
DGND on Bottom Layer "DGND_PLANE" (solid, remove dead copper, pour order 6): 1968.5,2687.01 1968.5,19.68 4458.66,19.68 4468.5,19.68 4468.5,2687.01 1968.5,2687.01
GROUND on Top Layer "DDGND_PLANE_TOP" (solid, remove dead copper, pour order 9): 19.68,3917.32 19.68,19.68 1958.66,19.68 1958.66,2696.85 4478.35,2696.85 4478.35,29.53 4478.35,19.68 5885.83,19.68 5885.83,3917.32 19.68,3917.32
DGND on Top Layer "DDDGND_PLANE_TOP" (solid, remove dead copper, pour order 7): 4468.5,19.68 4468.5,2687.01 1968.5,2687.01 1968.5,19.68 4468.5,19.68

## Keep-outs
Keep-Out Layer:
  lines w5: 19.68,19.68 19.68,3917.32 5885.83,3917.32 5885.83,19.68 19.68,19.68

## Silkscreen, mask and mechanical layers (free items; w line width, h text height)
Mechanical 1:
  the board outline again, w5
Mechanical 15:
  text "CORTADA" at 2450.79,1141.73 h60
  text "CORTADA" at 698.82,147.64 h60

## Dimensions
5905.51,0 to 0,0 on Top Overlay
5905.51,3937.01 to 5905.51,0 on Top Overlay